# EAGLE board projet_electronique1 (EAGLE 7.2.0)
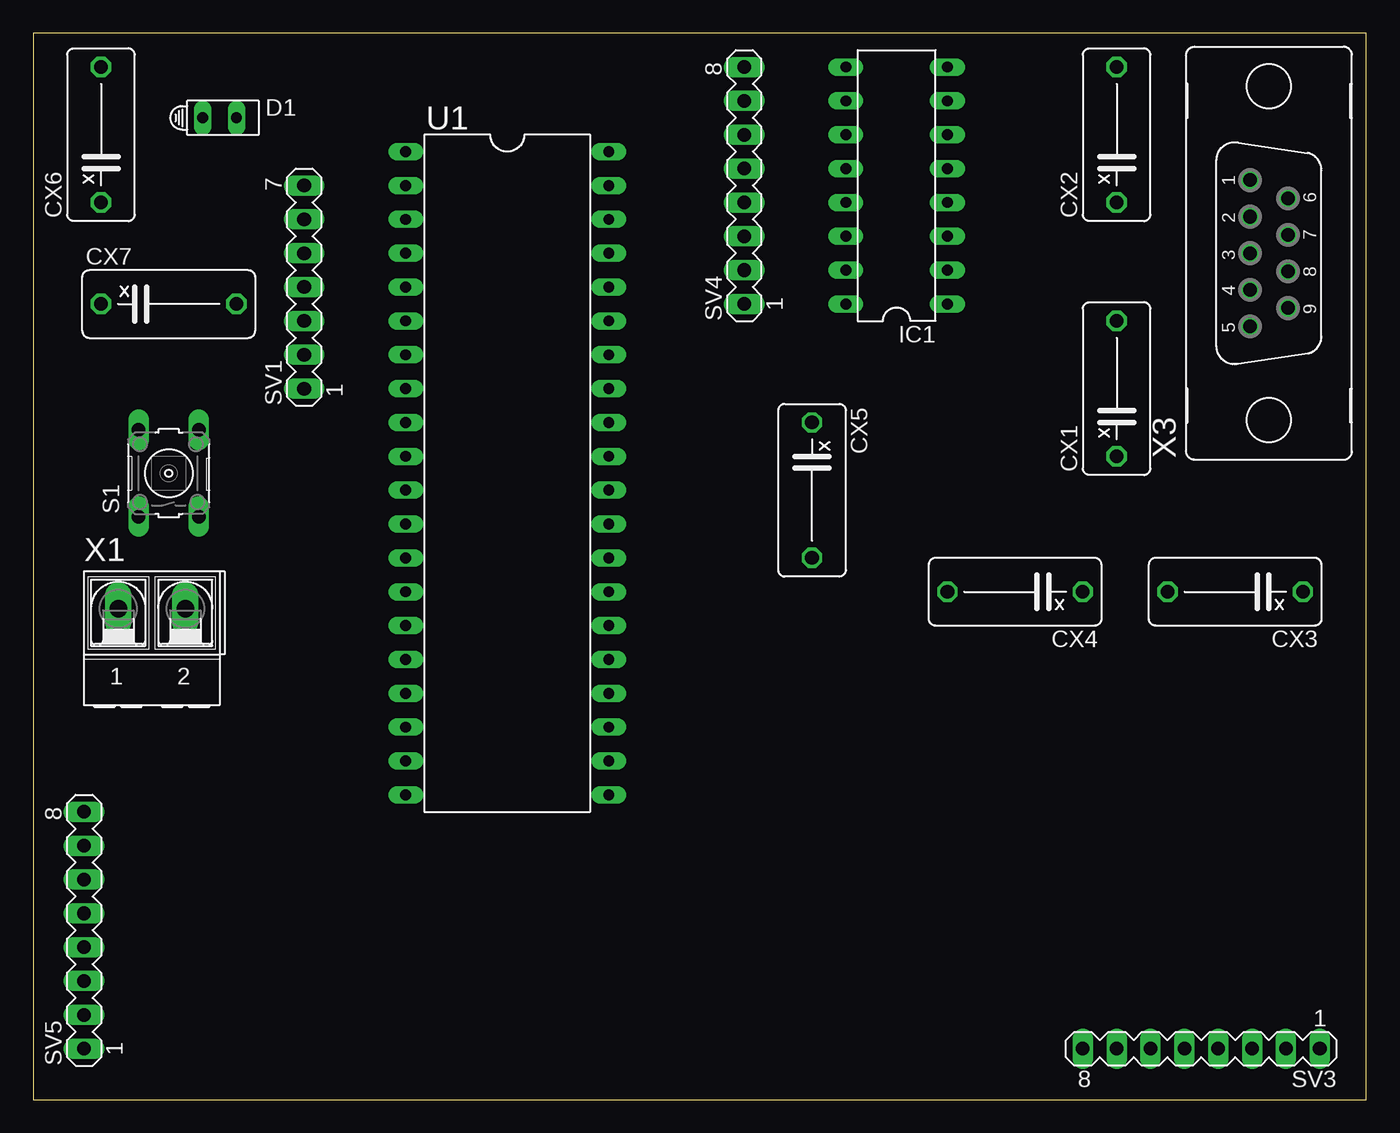
[diagram p0: board, top side]
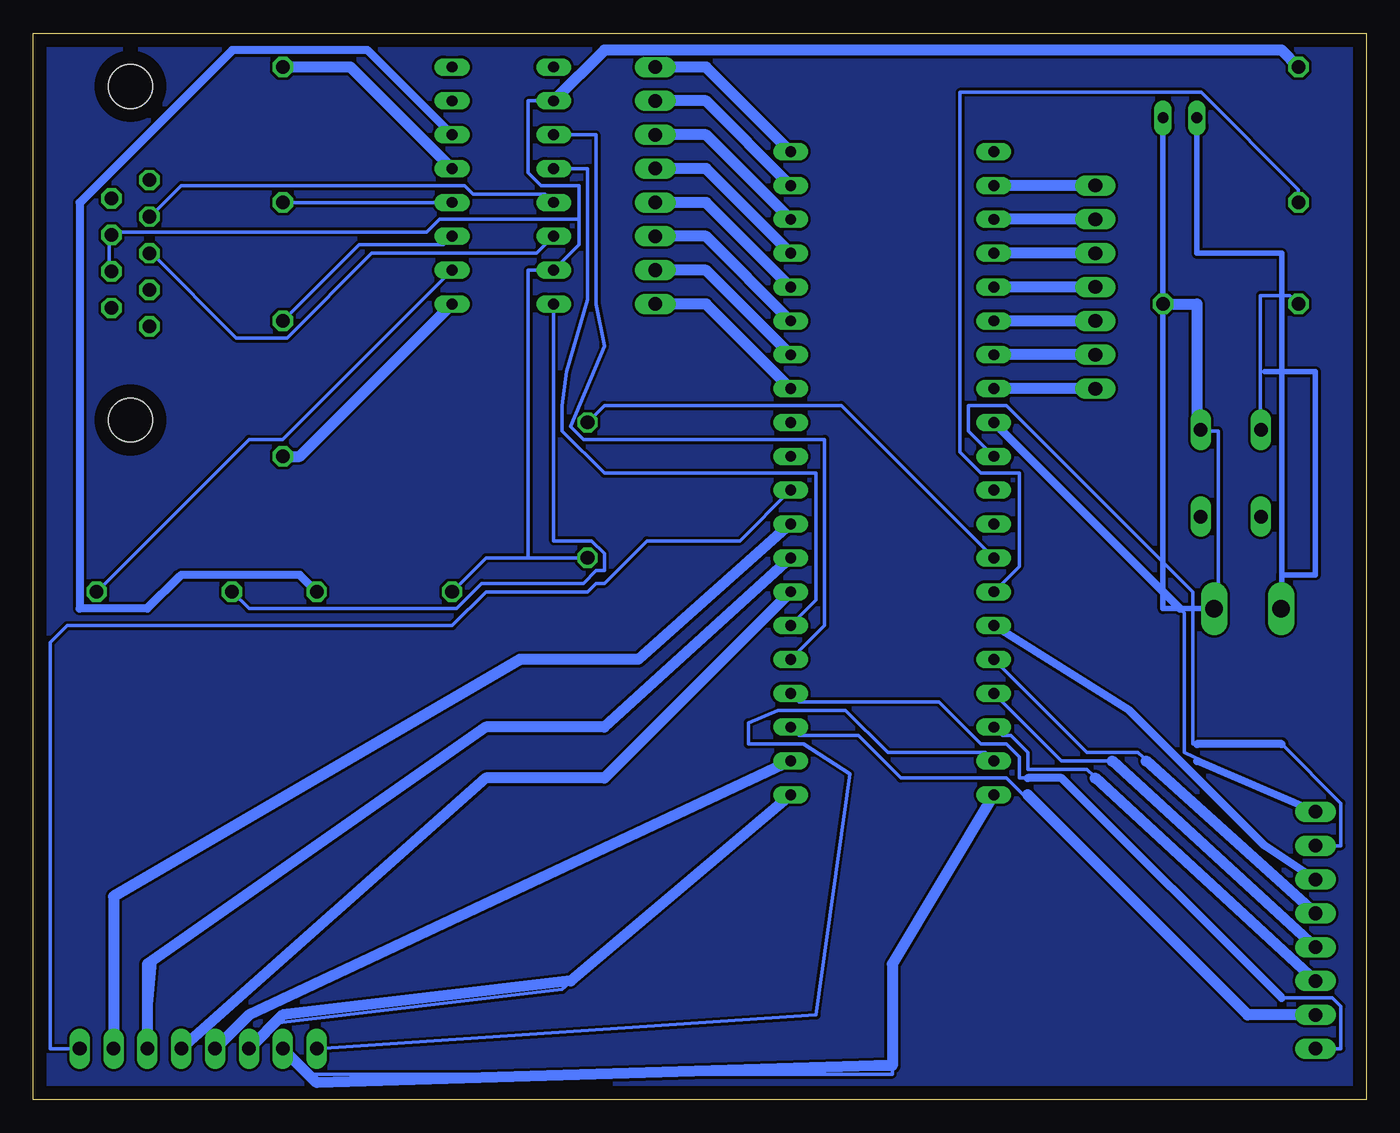
[diagram p1: board, bottom side, seen from below]

Size 100 x 80 mm. Coordinates in mm from the lower left corner, seen from the top.
Outline: 0,0 100,0 100,80 0,80 0,0
Copper layers (1*16): Top 0.035mm / dielectric 1.5mm / Bottom 0.035mm
Design rules "default": minimum track width 10mil, minimum drill 24mil, track to track 8mil, track to pad 8mil, pad to pad 8mil, via to via 8mil, smd to smd 8mil, copper to edge 40mil, drill to drill 8mil, minimum pad ring 10mil, minimum via ring 8mil, stop-mask expansion 4mil, vias tented up to drill 0mil, thermal gap 10mil

## Footprints (pad centres in the part's own frame; a part is rotated, then mirrored left to right if it is on the bottom)
XC10B5 = drill 1.016 octagon: 1 -5.08,0; 2 5.08,0
HLMP6 = drill 0.813 long: A -1.27,0; K 1.27,0
DIL16 = drill 0.813 long: 1 -8.89,-3.81; 2 -6.35,-3.81; 3 -3.81,-3.81; 4 -1.27,-3.81; 5 1.27,-3.81; 6 3.81,-3.81; 7 6.35,-3.81; 8 8.89,-3.81; 9 8.89,3.81; 10 6.35,3.81; 11 3.81,3.81; 12 1.27,3.81; 13 -1.27,3.81; 14 -3.81,3.81; 15 -6.35,3.81; 16 -8.89,3.81
B3F-10XX = drill 1.016 long: 1 -3.251,2.261; 2 3.251,2.261; 3 -3.251,-2.261; 4 3.251,-2.261
MA07-1 = drill 1.016 long: 1 -7.62,0; 2 -5.08,0; 3 -2.54,0; 4 0,0; 5 2.54,0; 6 5.08,0; 7 7.62,0
MA08-1 = drill 1.016 long: 1 -8.89,0; 2 -6.35,0; 3 -3.81,0; 4 -1.27,0; 5 1.27,0; 6 3.81,0; 7 6.35,0; 8 8.89,0
DIL40 = drill 0.813 long: 1 -24.13,-7.62; 2 -21.59,-7.62; 3 -19.05,-7.62; 4 -16.51,-7.62; 5 -13.97,-7.62; 6 -11.43,-7.62; 7 -8.89,-7.62; 8 -6.35,-7.62; 9 -3.81,-7.62; 10 -1.27,-7.62; 11 1.27,-7.62; 12 3.81,-7.62; 13 6.35,-7.62; 14 8.89,-7.62; 15 11.43,-7.62; 16 13.97,-7.62; 17 16.51,-7.62; 18 19.05,-7.62; 19 21.59,-7.62; 20 24.13,-7.62; 21 24.13,7.62; 22 21.59,7.62; 23 19.05,7.62; 24 16.51,7.62; 25 13.97,7.62; 26 11.43,7.62; 27 8.89,7.62; 28 6.35,7.62; 29 3.81,7.62; 30 1.27,7.62; 31 -1.27,7.62; 32 -3.81,7.62; 33 -6.35,7.62; 34 -8.89,7.62; 35 -11.43,7.62; 36 -13.97,7.62; 37 -16.51,7.62; 38 -19.05,7.62; 39 -21.59,7.62; 40 -24.13,7.62
AK500/2-H = drill 1.321 long: 1 -2.515,0; 2 2.515,0
F09V = drill 1.016 octagon: 1 5.486,1.422; 2 2.743,1.422; 3 0,1.422; 4 -2.743,1.422; 5 -5.486,1.422; 6 4.115,-1.422; 7 1.372,-1.422; 8 -1.372,-1.422; 9 -4.115,-1.422 | hole 3.302: -12.522,0; 12.522,0

## Placement (x,y rotation side)
CX1  1u  [XC10B5]  81.28,53.34 90 top
CX2  1u  [XC10B5]  81.28,72.39 90 top
CX3  1u  [XC10B5]  90.17,38.1 180 top
CX4  1u  [XC10B5]  73.66,38.1 180 top
CX5  15p  [XC10B5]  58.42,45.72 270 top
CX6  15p  [XC10B5]  5.08,72.39 90 top
CX7  680n  [XC10B5]  10.16,59.69 0 top
D1  HLMP6  [HLMP6]  13.97,73.66 0 top
IC1  MAX232  [DIL16]  64.77,68.58 90 top
S1  [B3F-10XX]  10.16,46.99 90 top
SV1  [MA07-1]  20.32,60.96 90 top
SV3  [MA08-1]  87.63,3.81 180 top
SV4  [MA08-1]  53.34,68.58 90 top
SV5  [MA08-1]  3.81,12.7 90 top
U1  PIC16F877P  [DIL40]  35.56,46.99 270 top
X1  [AK500/2-H]  8.89,36.83 0 top
X3  [F09V]  92.71,63.5 90 top

## Library data of the parts
CX1-CX7 = rcl
D1 = display-hp; MF: AGILENT TECHNOLOGIES; MPN: HLMP-6500; OC_FARNELL: 1652490; OC_NEWARK: 40K0088
IC1 = maxim; MF: MAXIM; MPN: MAX232ACPE+; OC_FARNELL: 9723773; OC_NEWARK: 68K4544
S1 = switch-omron; MPN: B3F-1000; OC_FARNELL: 176432; OC_NEWARK: 36M3542
SV1 SV3-SV5 = con-lstb; OC_FARNELL: unknown; OC_NEWARK: unknown
U1 = pic16f87x
X1 = con-ptr500; OC_FARNELL: unknown; OC_NEWARK: unknown
X3 = con-subd; OC_FARNELL: unknown; OC_NEWARK: unknown

## Nets
GND: CX4.2 CX5.2 CX6.2 IC1.10 IC1.15 X3.7 X3.8
N$1: X1.1
N$2: CX7.1 S1.2
N$4: CX5.1 U1.13
N$5: CX1.1 IC1.1
N$6: CX7.2 S1.4 X1.2
N$7: CX6.1 U1.14
N$8: CX1.2 IC1.3
N$9: CX2.1 IC1.4
N$10: CX2.2 IC1.5
N$11: CX3.1 IC1.2
N$12: CX4.1 IC1.6
N$13: IC1.11 U1.25
N$14: IC1.12 U1.26
N$15: SV1.7 U1.2
N$16: IC1.14 X3.3
N$17: IC1.13 X3.2
N$18: SV4.1 U1.33
N$19: SV4.2 U1.34
N$20: SV4.3 U1.35
N$21: SV4.4 U1.36
N$22: SV1.6 U1.3
N$23: SV1.5 U1.4
N$24: SV1.4 U1.5
N$25: SV1.3 U1.6
N$26: SV1.2 U1.7
N$27: SV1.1 U1.8
N$28: SV3.8 U1.19
N$29: SV3.7 U1.20
N$30: SV3.6 U1.21
N$31: SV3.5 U1.22
N$32: SV3.4 U1.27
N$33: SV3.3 U1.28
N$34: SV3.2 U1.29
N$35: SV3.1 U1.30
N$36: SV4.5 U1.37
N$37: SV4.6 U1.38
N$38: SV4.7 U1.39
N$39: SV4.8 U1.40
N$40: SV5.8 U1.9
N$41: SV5.7 U1.10
N$42: SV5.6 U1.15
N$43: SV5.5 U1.16
N$44: SV5.4 U1.17
N$45: SV5.3 U1.18
N$46: SV5.2 U1.23
N$47: SV5.1 U1.24
S$1: D1.K
S$3: D1.A
VCC: CX3.2 IC1.16

## Tracks (layer width: path | path; a pad name or v marks a point on that pad's centre or on a via)
GND
  Bottom 0.254: CX4.2 66.04,40.64 62.87,40.64 | CX5.2 62.87,40.64 | X3.8 94.3,62.23 94.3,64.77 X3.7 93.98,65.09 70.48,65.09 69.53,66.04 59.05,66.04 | 59.05,66.04 59.05,68.58 61.91,68.58 62.87,69.53 62.87,74.93 IC1.10 | 59.05,66.04 59.05,64.14 IC1.15 62.87,62.23 62.87,40.64
  Bottom 0.813: CX6.2 6.35,78.74 57.15,78.74 IC1.10
N$2
  Bottom 0.254: CX7.1 5.71,60.33 7.94,60.33 7.94,50.48 S1.2
N$4
  Bottom 0.254: U1.13 39.37,52.07 57.15,52.07 CX5.1
N$5
  Bottom 0.813: IC1.1 80.01,48.26 CX1.1
N$6
  Bottom 0.254: 12.7,59.69 12.7,50.48 S1.4 12.38,50.16 11.11,50.16 11.11,36.83 X1.2
  Bottom 0.813: CX7.2 12.7,59.69 12.7,49.53
N$7
  Bottom 0.254: U1.14 26.04,40.01 26.04,46.99 28.89,46.99 30.48,48.58 30.48,75.56 12.38,75.56 5.08,68.26 CX6.1
N$8
  Bottom 0.254: IC1.3 69.22,64.14 75.56,64.14 CX1.2
N$9
  Bottom 0.254: CX2.1 IC1.4
N$10
  Bottom 0.813: IC1.5 76.2,77.47 CX2.2
N$11
  Bottom 0.254: IC1.2 81.28,49.53 83.82,49.53 CX3.1
N$12
  Bottom 0.254: 74.93,78.74 84.77,78.74 96.52,66.99 96.52,36.83 91.76,36.83 89.22,39.37 88.9,39.37
  Bottom 0.61: IC1.6 74.93,78.74 85.09,78.74 96.52,67.31 96.52,36.83 91.44,36.83 88.9,39.37 80.01,39.37 CX4.1
N$13
  Bottom 0.254: U1.25 40.64,35.56 40.64,49.53 58.74,49.53 59.69,50.48 57.15,56.52 57.78,59.69 57.78,72.39 IC1.11
N$14
  Bottom 0.254: U1.26 41.27,37.47 41.27,46.99 57.15,46.99 60.33,50.16 60.33,52.07 60.01,54.61 58.42,60.01 58.42,69.85 IC1.12
N$15
  Bottom 0.813: SV1.7 U1.2
N$16
  Bottom 0.254: IC1.14 62.23,63.5 74.61,63.5 80.96,57.15 84.77,57.15 91.12,63.5 X3.3
N$17
  Bottom 0.254: IC1.13 61.59,67.94 66.99,67.94 67.63,68.58 88.9,68.58 91.12,66.36 X3.2
N$18
  Bottom 0.813: U1.33 49.53,59.69 SV4.1
N$19
  Bottom 0.813: U1.34 49.53,62.23 SV4.2
N$20
  Bottom 0.813: U1.35 49.53,64.77 SV4.3
N$21
  Bottom 0.813: U1.36 49.53,67.31 SV4.4
N$22
  Bottom 0.813: SV1.6 U1.3
N$23
  Bottom 0.813: SV1.5 U1.4
N$24
  Bottom 0.813: SV1.4 U1.5
N$25
  Bottom 0.813: SV1.3 U1.6
N$26
  Bottom 0.813: SV1.2 U1.7
N$27
  Bottom 0.813: SV1.1 U1.8
N$28
  Bottom 0.254: U1.19 28.57,26.04 35.88,26.04 39.05,29.21 44.13,29.21 46.35,28.26 46.35,26.67 42.23,26.67 38.73,24.45 41.27,6.35 SV3.8
N$29
  Bottom 0.254: 35.56,2.54 35.56,1.91 79.38,1.91 SV3.7
  Bottom 0.813: U1.20 35.56,10.16 35.56,2.54 36.83,2.54 78.74,1.27 SV3.7
N$30
  Bottom 0.254: U1.21 60.33,8.26 81.92,5.71 SV3.6
  Bottom 0.813: U1.21 59.69,8.89 81.28,6.35 SV3.6
N$31
  Bottom 0.254: U1.22 69.85,12.7 83.82,6.35
  Bottom 0.813: U1.22 83.82,6.35 SV3.5
N$32
  Bottom 0.813: U1.27 57.15,24.13 66.04,24.13 SV3.4
N$33
  Bottom 0.254: 66.04,27.94 90.81,10.79 SV3.3
  Bottom 0.813: U1.28 57.15,27.94 66.04,27.94 91.44,10.16 SV3.3
N$34
  Bottom 0.254: 54.61,33.02 63.18,33.02 93.66,15.24 93.98,6.35 SV3.2
  Bottom 0.813: U1.29 54.61,33.02 63.5,33.02 93.98,15.24 SV3.2
N$35
  Bottom 0.254: U1.30 46.99,41.91 53.98,41.91 57.15,38.73 57.78,38.73 58.42,38.1 66.04,38.1 68.58,35.56 97.47,35.56 98.74,34.29 98.74,3.81 SV3.1
N$36
  Bottom 0.813: U1.37 49.53,69.85 SV4.5
N$37
  Bottom 0.813: U1.38 49.53,72.39 SV4.6
N$38
  Bottom 0.813: U1.39 49.53,74.93 SV4.7
N$39
  Bottom 0.813: U1.40 49.53,77.47 SV4.8
N$40
  Bottom 0.254: 13.97,36.83 13.65,36.51 13.65,26.04 8.26,23.5 SV5.8
  Bottom 0.61: SV5.8 12.7,25.4 | 13.97,36.83 U1.9
N$41
  Bottom 0.254: U1.10 29.84,50.16 29.84,52.07 26.99,52.07 13.02,38.1 13.02,26.67 12.7,26.67 | 6.35,26.67 1.91,22.23 1.91,19.05 SV5.7
  Bottom 0.61: 6.35,26.67 12.7,26.67
N$42
  Bottom 0.61: SV5.6 7.62,19.05 17.78,29.21 U1.15
N$43
  Bottom 0.254: U1.16 20.95,26.04 17.14,26.04 SV5.5
  Bottom 0.813: SV5.5 16.51,25.4
N$44
  Bottom 0.254: U1.17 22.86,25.4 19.05,25.4
  Bottom 0.813: SV5.4 19.05,25.4
N$45
  Bottom 0.254: U1.18 27.3,27.3 26.67,27.3 25.4,26.04 25.4,24.77 20.95,24.77 SV5.3
  Bottom 0.813: SV5.3 20.32,24.13
N$46
  Bottom 0.254: U1.23 42.55,27.3 38.1,27.3 34.92,24.13 26.99,24.13 9.21,6.35 8.89,6.35
  Bottom 0.813: SV5.2 8.89,6.35 25.4,22.86
N$47
  Bottom 0.254: U1.24 42.55,29.84 32.07,29.84 28.89,26.67 26.99,26.67 26.04,25.72 26.04,24.13 25.4,24.13 | 6.35,7.62 2.54,7.62 1.91,6.99 1.91,3.81 SV5.1
  Bottom 0.61: 6.35,7.62 22.86,24.13 25.4,24.13
N$48
  pour Bottom: 0,0 99.06,0 100.33,0 100.33,80.01 0,80.01
S$1
  Bottom 0.406: 11.43,36.83 15.24,36.83 D1.K
S$3
  Bottom 0.406: 7.62,54.61 3.81,54.61 3.81,39.37 6.35,39.37 | 6.35,39.37 6.35,63.5 12.7,63.5 D1.A | 6.35,39.37 6.35,36.83
VCC
  Bottom 0.254: IC1.16 60.96,41.91 58.1,41.91 57.15,40.96 57.15,39.69 57.78,39.69 58.74,38.73 66.36,38.73 68.26,36.83 83.82,36.83 CX3.2